# Altium PCB layout.PcbDoc (part 2 of 11)
Units mil, origin at the board's own origin, x right, y up, seen from the top; angles counter-clockwise.
Board outline 3543.31 x 3149.61 mil, 2 copper layers (Top Layer, Bottom Layer); 78 components, 73 nets, 327 pads, 143 vias.
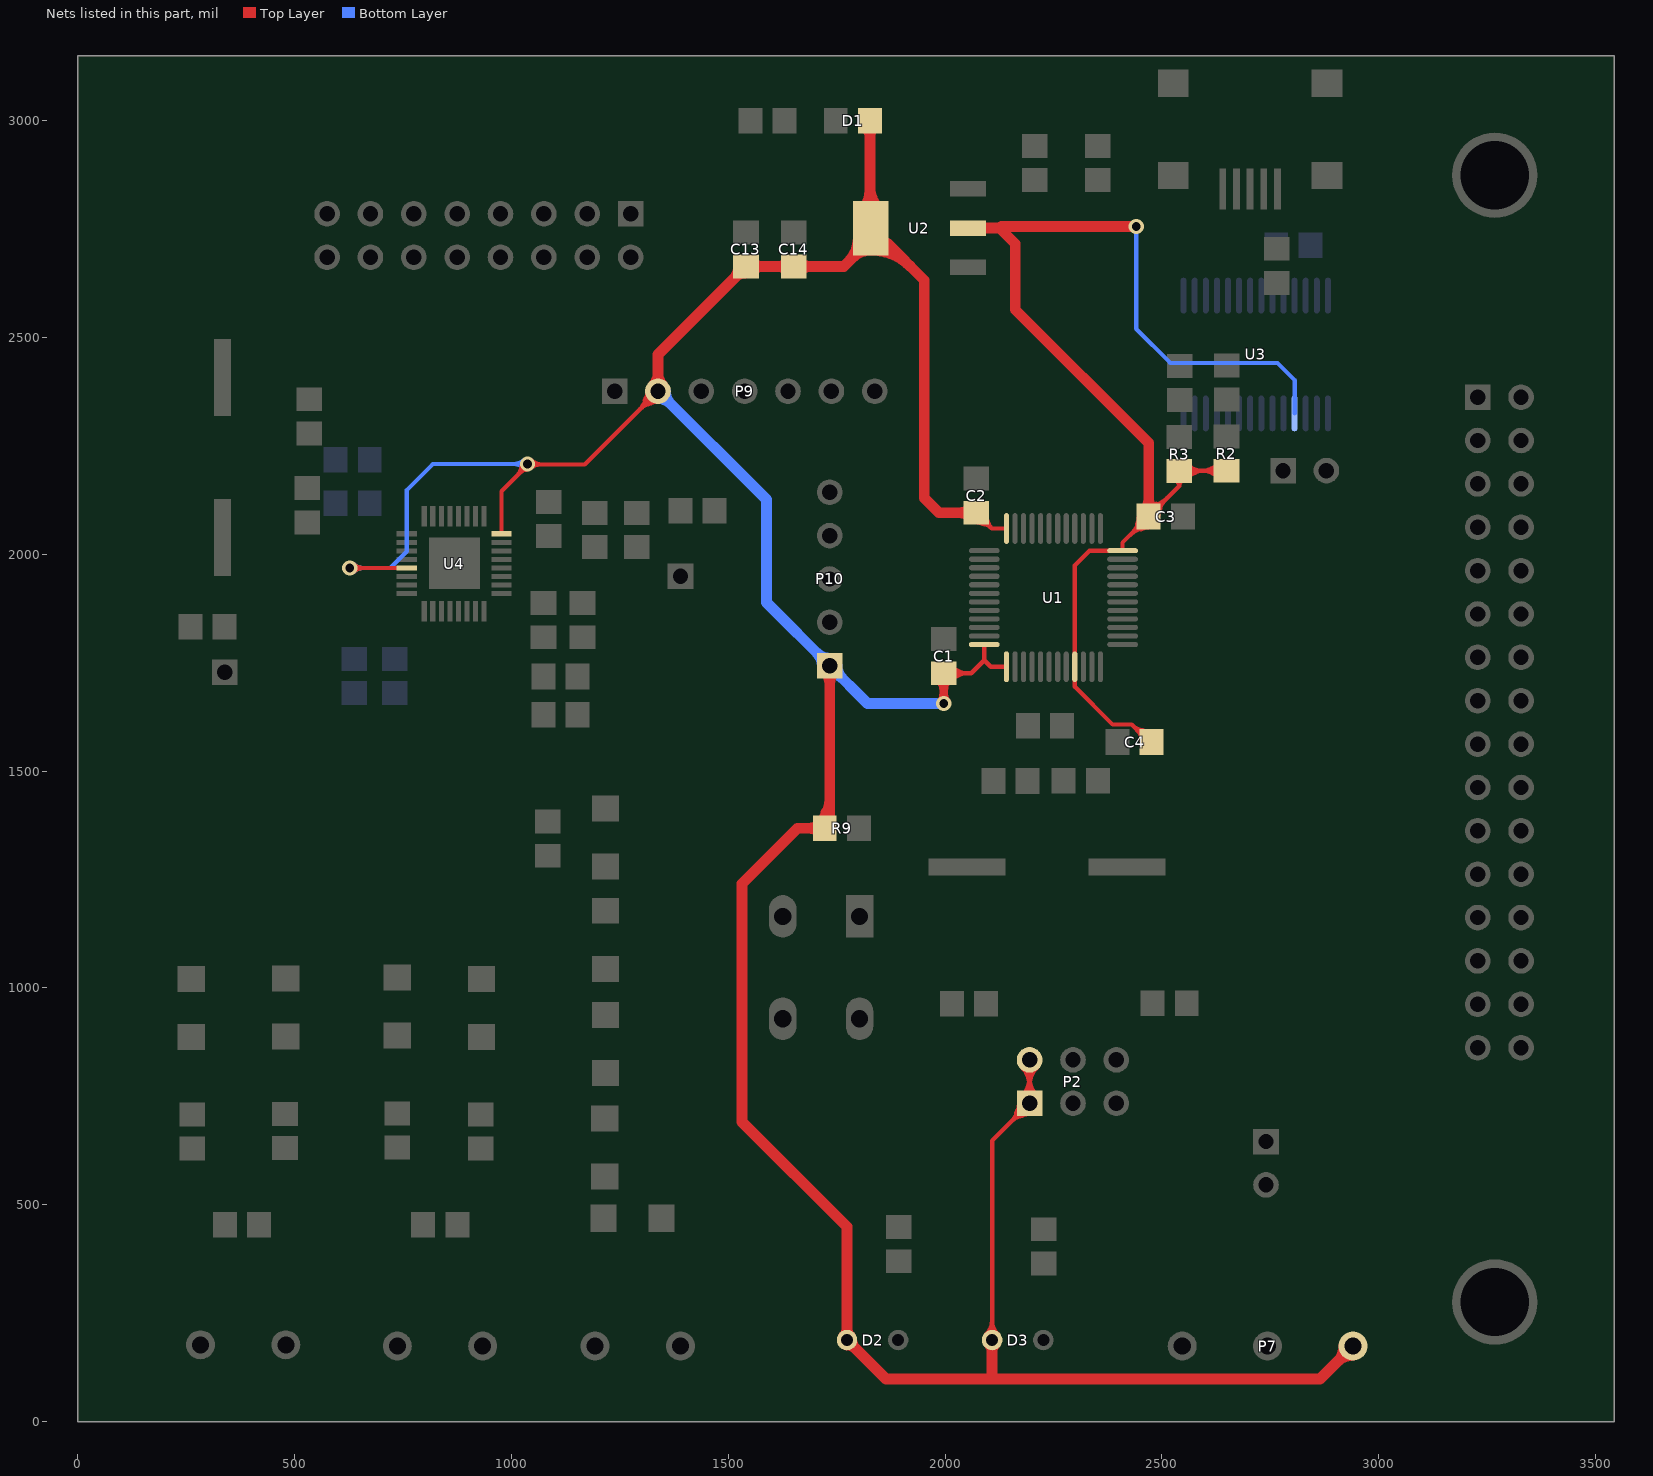
[diagram p2: the nets of this part, all layers, seen from the top]

## Via types
v1: diameter 35, hole 20, Top Layer to Bottom Layer, tented both sides, 113 vias
v2: diameter 35, hole 20, Top Layer to Bottom Layer, 28 vias
v3: diameter 35.43, hole 35.43, Top Layer to Bottom Layer, 2 vias

## Nets (pads, with @x,y where several pads share a name; then routed paths per layer and width w, separated by ;. In a path a pad name is that pad's centre, name@x,y a point inside that pad or via, vN(x,y) a via of type N, cw(c..) or ccw(c..) an arc to the next point about the centre after c; other vN are vias at no path point)
3.3V: C1.2 C2.2 C3.2 C4.2 C13.2 C14.2 D1.1 D2.1 D3.1 P2.1 P2.2 P7.3 P9.2 P10.1 R2.2 R3.2 R9.2 U1.1 U1.9 U1.24 U1.36 U1.48 U2.2 U2.4 U3.4 U4.5 U4.24 | length 34952.4
  Top Layer w10: v2(627.47,1968.47) U4.5@758.72,1968.47 ; U4.24@977.23,2047.21 977.23,2145.23 v2@1038.5,2206.5 ; v2@1039,2207 1169,2207 P9.2@1338,2376 ; v2(1997,1656) C1.2@1997,1725.63 2060.63,1725.63 2090.55,1755.55 ; C2.2@2072,2095.63 2108.18,2059.45 ; U1.48@2090.55,1791.73 2090.55,1755.55 ; D3.1@2108.59,187.98 2108.59,647.59 P2.1@2195,734 P2.2@2195,834 ; U1.1@2141.73,1740.55 2105.55,1740.55 2090.55,1755.55 ; U1.36@2141.73,2059.45 2108.18,2059.45 ; C4.2@2476.37,1567 2470.27,1567 2429.75,1607.53 ; R2.2@2649,2192.63 2541,2192.63 R3.2@2540,2191.63 2540,2157.37 ; v2@636.31,1959.63 cw(c657.65,1938.29) 657.65,1968.47 ; v2@636.31,1959.63 cw(c657.65,1938.29) 657.65,1968.47 ; v2@636.31,1959.63 cw(c657.65,1938.29) 657.65,1968.47 ; v2@636.31,1959.63 cw(c657.65,1938.29) 657.65,1968.47 ; v2@636.31,1959.63 cw(c657.65,1938.29) 657.65,1968.47 ; v2@636.31,1977.31 ccw(c657.65,1998.65) 657.65,1968.47 ; v2@636.31,1977.31 ccw(c657.65,1998.65) 657.65,1968.47 ; v2@636.31,1977.31 ccw(c657.65,1998.65) 657.65,1968.47 ; v2@636.31,1977.31 ccw(c657.65,1998.65) 657.65,1968.47 ; v2@636.31,1977.31 ccw(c657.65,1998.65) 657.65,1968.47 ; 1013.54,2181.54 ccw(c987.08,2208) v2@1024.5,2208 ; 1013.54,2181.54 ccw(c987.08,2208) v2@1024.5,2208 ; 1013.54,2181.54 ccw(c987.08,2208) v2@1024.5,2208 ; 1013.54,2181.54 ccw(c987.08,2208) v2@1024.5,2208 ; 1013.54,2181.54 ccw(c987.08,2208) v2@1024.5,2208 ; 1018.66,2186.2 cw(c1045.35,2179.04) v2@1037.69,2205.6 ; 1018.66,2186.2 cw(c1045.35,2179.04) v2@1037.69,2205.6 ; 1018.66,2186.2 cw(c1045.35,2179.04) v2@1037.69,2205.6 ; 1018.66,2186.2 cw(c1045.35,2179.04) v2@1037.69,2205.6 ; 1018.66,2186.2 cw(c1045.35,2179.04) v2@1037.69,2205.6 ; 1018.66,2186.2 cw(c1045.35,2179.04) v2@1037.69,2205.6 ; 1018.66,2186.2 cw(c1045.35,2179.04) v2@1037.69,2205.6 ; 1018.66,2186.2 cw(c1045.35,2179.04) v2@1037.69,2205.6 ; 1018.66,2186.2 cw(c1045.35,2179.04) v2@1037.69,2205.6 ; 1018.66,2186.2 cw(c1045.35,2179.04) v2@1037.69,2205.6 ; 1020.78,2188.78 cw(c1037,2172.57) v2@1037,2195.5 ; 1020.78,2188.78 cw(c1037,2172.57) v2@1037,2195.5 ; 1020.78,2188.78 cw(c1037,2172.57) v2@1037,2195.5 ; 1020.78,2188.78 cw(c1037,2172.57) v2@1037,2195.5 ; 1020.78,2188.78 cw(c1037,2172.57) v2@1037,2195.5 ; v2@1045.84,2199.16 cw(c1064.76,2180.24) 1064.76,2207 ; v2@1045.84,2199.16 cw(c1064.76,2180.24) 1064.76,2207 ; v2@1045.84,2199.16 cw(c1064.76,2180.24) 1064.76,2207 ; v2@1045.84,2199.16 cw(c1064.76,2180.24) 1064.76,2207 ; v2@1045.84,2199.16 cw(c1064.76,2180.24) 1064.76,2207 ; v2@1045.84,2216.84 ccw(c1069.59,2240.59) 1069.59,2207 ; v2@1045.84,2216.84 ccw(c1069.59,2240.59) 1069.59,2207 ; v2@1045.84,2216.84 ccw(c1069.59,2240.59) 1069.59,2207 ; v2@1045.84,2216.84 ccw(c1069.59,2240.59) 1069.59,2207 ; v2@1045.84,2216.84 ccw(c1069.59,2240.59) 1069.59,2207 ; 1296.13,2334.13 cw(c1338,2292.26) P9.2@1338,2351.47 ; 1296.13,2334.13 ccw(c1254.26,2376) P9.2@1313.47,2376 ; 1296.13,2334.13 cw(c1338,2292.26) P9.2@1338,2351.47 ; 1296.13,2334.13 ccw(c1254.26,2376) P9.2@1313.47,2376 ; 1296.13,2334.13 cw(c1338,2292.26) P9.2@1338,2351.47 ; 1296.13,2334.13 ccw(c1254.26,2376) P9.2@1313.47,2376 ; 1296.13,2334.13 cw(c1338,2292.26) P9.2@1338,2351.47 ; 1296.13,2334.13 ccw(c1254.26,2376) P9.2@1313.47,2376 ; 1296.13,2334.13 cw(c1338,2292.26) P9.2@1338,2351.47 ; 1296.13,2334.13 ccw(c1254.26,2376) P9.2@1313.47,2376 ; 1307.48,2353.65 cw(c1344.61,2343.7) P9.2@1336.9,2381.36 ; 1307.48,2353.65 cw(c1344.61,2343.7) P9.2@1336.9,2381.36 ; 1307.48,2353.65 cw(c1344.61,2343.7) P9.2@1336.9,2381.36 ; 1307.48,2353.65 cw(c1344.61,2343.7) P9.2@1336.9,2381.36 ; 1307.48,2353.65 cw(c1344.61,2343.7) P9.2@1336.9,2381.36 ; 1307.48,2353.65 cw(c1344.61,2343.7) P9.2@1336.9,2381.36 ; 1307.48,2353.65 cw(c1344.61,2343.7) P9.2@1336.9,2381.36 ; 1307.48,2353.65 cw(c1344.61,2343.7) P9.2@1336.9,2381.36 ; 1307.48,2353.65 cw(c1344.61,2343.7) P9.2@1336.9,2381.36 ; 1307.48,2353.65 cw(c1344.61,2343.7) P9.2@1336.9,2381.36 ; 1313.2,2351.2 cw(c1338,2326.4) P9.2@1338,2361.47 ; 1313.2,2351.2 ccw(c1288.4,2376) P9.2@1323.47,2376 ; 1313.2,2351.2 cw(c1338,2326.4) P9.2@1338,2361.47 ; 1313.2,2351.2 ccw(c1288.4,2376) P9.2@1323.47,2376 ; 1313.2,2351.2 cw(c1338,2326.4) P9.2@1338,2361.47 ; 1313.2,2351.2 ccw(c1288.4,2376) P9.2@1323.47,2376 ; 1313.2,2351.2 cw(c1338,2326.4) P9.2@1338,2361.47 ; 1313.2,2351.2 ccw(c1288.4,2376) P9.2@1323.47,2376 ; 1313.2,2351.2 cw(c1338,2326.4) P9.2@1338,2361.47 ; 1313.2,2351.2 ccw(c1288.4,2376) P9.2@1323.47,2376 ; 1315.65,2345.48 ccw(c1305.7,2382.61) P9.2@1343.36,2374.9 ; 1315.65,2345.48 ccw(c1305.7,2382.61) P9.2@1343.36,2374.9 ; 1315.65,2345.48 ccw(c1305.7,2382.61) P9.2@1343.36,2374.9 ; 1315.65,2345.48 ccw(c1305.7,2382.61) P9.2@1343.36,2374.9 ; 1315.65,2345.48 ccw(c1305.7,2382.61) P9.2@1343.36,2374.9 ; 1315.65,2345.48 ccw(c1305.7,2382.61) P9.2@1343.36,2374.9 ; 1315.65,2345.48 ccw(c1305.7,2382.61) P9.2@1343.36,2374.9 ; 1315.65,2345.48 ccw(c1305.7,2382.61) P9.2@1343.36,2374.9 ; 1315.65,2345.48 ccw(c1305.7,2382.61) P9.2@1343.36,2374.9 ; 1315.65,2345.48 ccw(c1305.7,2382.61) P9.2@1343.36,2374.9 ; C1.2@1981.05,1709.68 cw(c1942.54,1671.17) v2@1997,1671.17 ; C1.2@1981.05,1709.68 cw(c1942.54,1671.17) v2@1997,1671.17 ; C1.2@1981.05,1709.68 cw(c1942.54,1671.17) v2@1997,1671.17 ; C1.2@1981.05,1709.68 cw(c1942.54,1671.17) v2@1997,1671.17 ; C1.2@1981.05,1709.68 cw(c1942.54,1671.17) v2@1997,1671.17 ; v2@1986.64,1662.99 ccw(c1957.41,1682.7) 1991.46,1691.83 ; v2@1986.64,1662.99 ccw(c1957.41,1682.7) 1991.46,1691.83 ; v2@1986.64,1662.99 ccw(c1957.41,1682.7) 1991.46,1691.83 ; v2@1986.64,1662.99 ccw(c1957.41,1682.7) 1991.46,1691.83 ; v2@1986.64,1662.99 ccw(c1957.41,1682.7) 1991.46,1691.83 ; v2@1986.64,1662.99 ccw(c1957.41,1682.7) 1991.46,1691.83 ; v2@1986.64,1662.99 ccw(c1957.41,1682.7) 1991.46,1691.83 ; v2@1986.64,1662.99 ccw(c1957.41,1682.7) 1991.46,1691.83 ; v2@1986.64,1662.99 ccw(c1957.41,1682.7) 1991.46,1691.83 ; v2@1986.64,1662.99 ccw(c1957.41,1682.7) 1991.46,1691.83 ; v2@1986.64,1662.99 ccw(c1957.41,1682.7) 1991.46,1691.83 ; v2@1986.64,1662.99 ccw(c1957.41,1682.7) 1991.46,1691.83 ; v2@1986.64,1662.99 ccw(c1957.41,1682.7) 1991.46,1691.83 ; v2@1986.64,1662.99 ccw(c1957.41,1682.7) 1991.46,1691.83 ; v2@1986.64,1662.99 ccw(c1957.41,1682.7) 1991.46,1691.83 ; C1.2@1988.12,1716.75 cw(c1966.68,1695.31) 1997,1695.31 ; C1.2@1988.12,1716.75 cw(c1966.68,1695.31) 1997,1695.31 ; C1.2@1988.12,1716.75 cw(c1966.68,1695.31) 1997,1695.31 ; C1.2@1988.12,1716.75 cw(c1966.68,1695.31) 1997,1695.31 ; C1.2@1988.12,1716.75 cw(c1966.68,1695.31) 1997,1695.31 ; v2@1988.16,1664.84 ccw(c1966.82,1686.18) 1997,1686.18 ; v2@1988.16,1664.84 ccw(c1966.82,1686.18) 1997,1686.18 ; v2@1988.16,1664.84 ccw(c1966.82,1686.18) 1997,1686.18 ; v2@1988.16,1664.84 ccw(c1966.82,1686.18) 1997,1686.18 ; v2@1988.16,1664.84 ccw(c1966.82,1686.18) 1997,1686.18 ; v2@1990.75,1666.83 ccw(c1982.36,1681.35) 1998.57,1677.01 ; v2@1990.75,1666.83 ccw(c1982.36,1681.35) 1998.57,1677.01 ; v2@1990.75,1666.83 ccw(c1982.36,1681.35) 1998.57,1677.01 ; v2@1990.75,1666.83 ccw(c1982.36,1681.35) 1998.57,1677.01 ; v2@1990.75,1666.83 ccw(c1982.36,1681.35) 1998.57,1677.01 ; v2@1990.75,1666.83 ccw(c1982.36,1681.35) 1998.57,1677.01 ; v2@1990.75,1666.83 ccw(c1982.36,1681.35) 1998.57,1677.01 ; v2@1990.75,1666.83 ccw(c1982.36,1681.35) 1998.57,1677.01 ; v2@1990.75,1666.83 ccw(c1982.36,1681.35) 1998.57,1677.01 ; v2@1990.75,1666.83 ccw(c1982.36,1681.35) 1998.57,1677.01 ; v2@1990.75,1666.83 ccw(c1982.36,1681.35) 1998.57,1677.01 ; v2@1990.75,1666.83 ccw(c1982.36,1681.35) 1998.57,1677.01 ; v2@1990.75,1666.83 ccw(c1982.36,1681.35) 1998.57,1677.01 ; v2@1990.75,1666.83 ccw(c1982.36,1681.35) 1998.57,1677.01 ; v2@1990.75,1666.83 ccw(c1982.36,1681.35) 1998.57,1677.01 ; 1995.43,1677.01 ccw(c2011.64,1681.35) v2@2003.25,1666.83 ; 1995.43,1677.01 ccw(c2011.64,1681.35) v2@2003.25,1666.83 ; 1995.43,1677.01 ccw(c2011.64,1681.35) v2@2003.25,1666.83 ; 1995.43,1677.01 ccw(c2011.64,1681.35) v2@2003.25,1666.83 ; 1995.43,1677.01 ccw(c2011.64,1681.35) v2@2003.25,1666.83 ; 1995.43,1677.01 ccw(c2011.64,1681.35) v2@2003.25,1666.83 ; 1995.43,1677.01 ccw(c2011.64,1681.35) v2@2003.25,1666.83 ; 1995.43,1677.01 ccw(c2011.64,1681.35) v2@2003.25,1666.83 ; 1995.43,1677.01 ccw(c2011.64,1681.35) v2@2003.25,1666.83 ; 1995.43,1677.01 ccw(c2011.64,1681.35) v2@2003.25,1666.83 ; 1995.43,1677.01 ccw(c2011.64,1681.35) v2@2003.25,1666.83 ; 1995.43,1677.01 ccw(c2011.64,1681.35) v2@2003.25,1666.83 ; 1995.43,1677.01 ccw(c2011.64,1681.35) v2@2003.25,1666.83 ; 1995.43,1677.01 ccw(c2011.64,1681.35) v2@2003.25,1666.83 ; 1995.43,1677.01 ccw(c2011.64,1681.35) v2@2003.25,1666.83 ; v2@1997,1671.17 cw(c2051.46,1671.17) C1.2@2012.95,1709.68 ; v2@1997,1671.17 cw(c2051.46,1671.17) C1.2@2012.95,1709.68 ; v2@1997,1671.17 cw(c2051.46,1671.17) C1.2@2012.95,1709.68 ; v2@1997,1671.17 cw(c2051.46,1671.17) C1.2@2012.95,1709.68 ; v2@1997,1671.17 cw(c2051.46,1671.17) C1.2@2012.95,1709.68 ; 1997,1686.18 ccw(c2027.18,1686.18) v2@2005.84,1664.84 ; 1997,1686.18 ccw(c2027.18,1686.18) v2@2005.84,1664.84 ; 1997,1686.18 ccw(c2027.18,1686.18) v2@2005.84,1664.84 ; 1997,1686.18 ccw(c2027.18,1686.18) v2@2005.84,1664.84 ; 1997,1686.18 ccw(c2027.18,1686.18) v2@2005.84,1664.84 ; 1997,1695.31 cw(c2027.32,1695.31) C1.2@2005.88,1716.75 ; 1997,1695.31 cw(c2027.32,1695.31) C1.2@2005.88,1716.75 ; 1997,1695.31 cw(c2027.32,1695.31) C1.2@2005.88,1716.75 ; 1997,1695.31 cw(c2027.32,1695.31) C1.2@2005.88,1716.75 ; 1997,1695.31 cw(c2027.32,1695.31) C1.2@2005.88,1716.75 ; 2002.54,1691.83 ccw(c2036.59,1682.7) v2@2007.36,1662.99 ; 2002.54,1691.83 ccw(c2036.59,1682.7) v2@2007.36,1662.99 ; 2002.54,1691.83 ccw(c2036.59,1682.7) v2@2007.36,1662.99 ; 2002.54,1691.83 ccw(c2036.59,1682.7) v2@2007.36,1662.99 ; 2002.54,1691.83 ccw(c2036.59,1682.7) v2@2007.36,1662.99 ; 2002.54,1691.83 ccw(c2036.59,1682.7) v2@2007.36,1662.99 ; 2002.54,1691.83 ccw(c2036.59,1682.7) v2@2007.36,1662.99 ; 2002.54,1691.83 ccw(c2036.59,1682.7) v2@2007.36,1662.99 ; 2002.54,1691.83 ccw(c2036.59,1682.7) v2@2007.36,1662.99 ; 2002.54,1691.83 ccw(c2036.59,1682.7) v2@2007.36,1662.99 ; 2002.54,1691.83 ccw(c2036.59,1682.7) v2@2007.36,1662.99 ; 2002.54,1691.83 ccw(c2036.59,1682.7) v2@2007.36,1662.99 ; 2002.54,1691.83 ccw(c2036.59,1682.7) v2@2007.36,1662.99 ; 2002.54,1691.83 ccw(c2036.59,1682.7) v2@2007.36,1662.99 ; 2002.54,1691.83 ccw(c2036.59,1682.7) v2@2007.36,1662.99 ; C1.2@2007.85,1716.75 cw(c2029.29,1695.31) 2029.29,1725.63 ; C1.2@2007.85,1716.75 cw(c2029.29,1695.31) 2029.29,1725.63 ; C1.2@2007.85,1716.75 cw(c2029.29,1695.31) 2029.29,1725.63 ; C1.2@2007.85,1716.75 cw(c2029.29,1695.31) 2029.29,1725.63 ; C1.2@2007.85,1716.75 cw(c2029.29,1695.31) 2029.29,1725.63 ; C1.2@2007.85,1734.51 ccw(c2029.29,1755.95) 2029.29,1725.63 ; C1.2@2007.85,1734.51 ccw(c2029.29,1755.95) 2029.29,1725.63 ; C1.2@2007.85,1734.51 ccw(c2029.29,1755.95) 2029.29,1725.63 ; C1.2@2007.85,1734.51 ccw(c2029.29,1755.95) 2029.29,1725.63 ; C1.2@2007.85,1734.51 ccw(c2029.29,1755.95) 2029.29,1725.63 ; C1.2@2014.92,1709.68 cw(c2053.43,1671.17) 2053.43,1725.63 ; C1.2@2014.92,1709.68 cw(c2053.43,1671.17) 2053.43,1725.63 ; C1.2@2014.92,1709.68 cw(c2053.43,1671.17) 2053.43,1725.63 ; C1.2@2014.92,1709.68 cw(c2053.43,1671.17) 2053.43,1725.63 ; C1.2@2014.92,1709.68 cw(c2053.43,1671.17) 2053.43,1725.63 ; C1.2@2014.92,1741.58 ccw(c2053.43,1780.09) 2053.43,1725.63 ; C1.2@2014.92,1741.58 ccw(c2053.43,1780.09) 2053.43,1725.63 ; C1.2@2014.92,1741.58 ccw(c2053.43,1780.09) 2053.43,1725.63 ; C1.2@2014.92,1741.58 ccw(c2053.43,1780.09) 2053.43,1725.63 ; C1.2@2014.92,1741.58 ccw(c2053.43,1780.09) 2053.43,1725.63 ; C2.2@2066.7,2094.05 ccw(c2099.04,2101.06) C2.2@2091.08,2068.94 ; C2.2@2066.7,2094.05 ccw(c2099.04,2101.06) C2.2@2091.08,2068.94 ; C2.2@2066.7,2094.05 ccw(c2099.04,2101.06) C2.2@2091.08,2068.94 ; C2.2@2066.7,2094.05 ccw(c2099.04,2101.06) C2.2@2091.08,2068.94 ; C2.2@2066.7,2094.05 ccw(c2099.04,2101.06) C2.2@2091.08,2068.94 ; C2.2@2066.7,2094.05 ccw(c2099.04,2101.06) C2.2@2091.08,2068.94 ; C2.2@2066.7,2094.05 ccw(c2099.04,2101.06) C2.2@2091.08,2068.94 ; C2.2@2066.7,2094.05 ccw(c2099.04,2101.06) C2.2@2091.08,2068.94 ; C2.2@2066.7,2094.05 ccw(c2099.04,2101.06) C2.2@2091.08,2068.94 ; C2.2@2066.7,2094.05 ccw(c2099.04,2101.06) C2.2@2091.08,2068.94 ; C2.2@2074.39,2073.07 cw(c2075.27,2026.54) 2108.18,2059.45 ; C2.2@2074.39,2073.07 cw(c2075.27,2026.54) 2108.18,2059.45 ; C2.2@2074.39,2073.07 cw(c2075.27,2026.54) 2108.18,2059.45 ; C2.2@2074.39,2073.07 cw(c2075.27,2026.54) 2108.18,2059.45 ; C2.2@2074.39,2073.07 cw(c2075.27,2026.54) 2108.18,2059.45 ; C2.2@2086.45,2094.23 ccw(c2110.84,2091.5) C2.2@2093.49,2074.14 ; C2.2@2086.45,2094.23 ccw(c2110.84,2091.5) C2.2@2093.49,2074.14 ; C2.2@2086.45,2094.23 ccw(c2110.84,2091.5) C2.2@2093.49,2074.14 ; C2.2@2086.45,2094.23 ccw(c2110.84,2091.5) C2.2@2093.49,2074.14 ; C2.2@2086.45,2094.23 ccw(c2110.84,2091.5) C2.2@2093.49,2074.14 ; D3.1@2095.42,201.14 ccw(c2063.63,232.93) 2108.59,232.93 ; D3.1@2095.42,201.14 ccw(c2063.63,232.93) 2108.59,232.93 ; D3.1@2095.42,201.14 ccw(c2063.63,232.93) 2108.59,232.93 ; D3.1@2095.42,201.14 ccw(c2063.63,232.93) 2108.59,232.93 ; D3.1@2095.42,201.14 ccw(c2063.63,232.93) 2108.59,232.93 ; C2.2@2096.39,2093.12 ccw(c2137.27,2088.54) 2108.18,2059.45 ; C2.2@2096.39,2093.12 ccw(c2137.27,2088.54) 2108.18,2059.45 ; C2.2@2096.39,2093.12 ccw(c2137.27,2088.54) 2108.18,2059.45 ; C2.2@2096.39,2093.12 ccw(c2137.27,2088.54) 2108.18,2059.45 ; C2.2@2096.39,2093.12 ccw(c2137.27,2088.54) 2108.18,2059.45 ; 2108.59,232.93 ccw(c2153.55,232.93) D3.1@2121.76,201.14 ; 2108.59,232.93 ccw(c2153.55,232.93) D3.1@2121.76,201.14 ; 2108.59,232.93 ccw(c2153.55,232.93) D3.1@2121.76,201.14 ; 2108.59,232.93 ccw(c2153.55,232.93) D3.1@2121.76,201.14 ; 2108.59,232.93 ccw(c2153.55,232.93) D3.1@2121.76,201.14 ; 2153.13,692.13 cw(c2195,650.26) P2.1@2195,709.47 ; 2153.13,692.13 ccw(c2111.26,734) P2.1@2170.47,734 ; 2153.13,692.13 cw(c2195,650.26) P2.1@2195,709.47 ; 2153.13,692.13 ccw(c2111.26,734) P2.1@2170.47,734 ; 2153.13,692.13 cw(c2195,650.26) P2.1@2195,709.47 ; 2153.13,692.13 ccw(c2111.26,734) P2.1@2170.47,734 ; 2153.13,692.13 cw(c2195,650.26) P2.1@2195,709.47 ; 2153.13,692.13 ccw(c2111.26,734) P2.1@2170.47,734 ; 2153.13,692.13 cw(c2195,650.26) P2.1@2195,709.47 ; 2153.13,692.13 ccw(c2111.26,734) P2.1@2170.47,734 ; 2164.48,711.65 cw(c2201.61,701.7) P2.1@2193.9,739.36 ; 2164.48,711.65 cw(c2201.61,701.7) P2.1@2193.9,739.36 ; 2164.48,711.65 cw(c2201.61,701.7) P2.1@2193.9,739.36 ; 2164.48,711.65 cw(c2201.61,701.7) P2.1@2193.9,739.36 ; 2164.48,711.65 cw(c2201.61,701.7) P2.1@2193.9,739.36 ; 2164.48,711.65 cw(c2201.61,701.7) P2.1@2193.9,739.36 ; 2164.48,711.65 cw(c2201.61,701.7) P2.1@2193.9,739.36 ; 2164.48,711.65 cw(c2201.61,701.7) P2.1@2193.9,739.36 ; 2164.48,711.65 cw(c2201.61,701.7) P2.1@2193.9,739.36 ; 2164.48,711.65 cw(c2201.61,701.7) P2.1@2193.9,739.36 ; P2.1@2170.2,709.2 cw(c2195,684.4) P2.1@2195,719.47 ; P2.1@2170.2,709.2 ccw(c2145.4,734) P2.1@2180.47,734 ; P2.1@2170.2,709.2 cw(c2195,684.4) P2.1@2195,719.47 ; P2.1@2170.2,709.2 ccw(c2145.4,734) P2.1@2180.47,734 ; P2.1@2170.2,709.2 cw(c2195,684.4) P2.1@2195,719.47 ; P2.1@2170.2,709.2 ccw(c2145.4,734) P2.1@2180.47,734 ; P2.1@2170.2,709.2 cw(c2195,684.4) P2.1@2195,719.47 ; P2.1@2170.2,709.2 ccw(c2145.4,734) P2.1@2180.47,734 ; P2.1@2170.2,709.2 cw(c2195,684.4) P2.1@2195,719.47 ; P2.1@2170.2,709.2 ccw(c2145.4,734) P2.1@2180.47,734 ; 2172.65,703.48 ccw(c2162.7,740.61) P2.1@2200.36,732.9 ; 2172.65,703.48 ccw(c2162.7,740.61) P2.1@2200.36,732.9 ; 2172.65,703.48 ccw(c2162.7,740.61) P2.1@2200.36,732.9 ; 2172.65,703.48 ccw(c2162.7,740.61) P2.1@2200.36,732.9 ; 2172.65,703.48 ccw(c2162.7,740.61) P2.1@2200.36,732.9 ; 2172.65,703.48 ccw(c2162.7,740.61) P2.1@2200.36,732.9 ; 2172.65,703.48 ccw(c2162.7,740.61) P2.1@2200.36,732.9 ; 2172.65,703.48 ccw(c2162.7,740.61) P2.1@2200.36,732.9 ; 2172.65,703.48 ccw(c2162.7,740.61) P2.1@2200.36,732.9 ; 2172.65,703.48 ccw(c2162.7,740.61) P2.1@2200.36,732.9 ; P2.1@2177.66,751.34 ccw(c2135.79,793.21) 2195,793.21 ; P2.1@2177.66,751.34 ccw(c2135.79,793.21) 2195,793.21 ; P2.1@2177.66,751.34 ccw(c2135.79,793.21) 2195,793.21 ; P2.1@2177.66,751.34 ccw(c2135.79,793.21) 2195,793.21 ; P2.1@2177.66,751.34 ccw(c2135.79,793.21) 2195,793.21 ; P2.2@2177.66,816.66 cw(c2135.79,774.79) 2195,774.79 ; P2.2@2177.66,816.66 cw(c2135.79,774.79) 2195,774.79 ; P2.2@2177.66,816.66 cw(c2135.79,774.79) 2195,774.79 ; P2.2@2177.66,816.66 cw(c2135.79,774.79) 2195,774.79 ; P2.2@2177.66,816.66 cw(c2135.79,774.79) 2195,774.79 ; P2.1@2184.73,744.27 ccw(c2159.93,769.07) 2195,769.07 ; P2.1@2184.73,744.27 ccw(c2159.93,769.07) 2195,769.07 ; P2.1@2184.73,744.27 ccw(c2159.93,769.07) 2195,769.07 ; P2.1@2184.73,744.27 ccw(c2159.93,769.07) 2195,769.07 ; P2.1@2184.73,744.27 ccw(c2159.93,769.07) 2195,769.07 ; P2.2@2184.73,823.73 cw(c2159.93,798.93) 2195,798.93 ; P2.2@2184.73,823.73 cw(c2159.93,798.93) 2195,798.93 ; P2.2@2184.73,823.73 cw(c2159.93,798.93) 2195,798.93 ; P2.2@2184.73,823.73 cw(c2159.93,798.93) 2195,798.93 ; P2.2@2184.73,823.73 cw(c2159.93,798.93) 2195,798.93 ; 2195,769.07 ccw(c2230.07,769.07) P2.1@2205.27,744.27 ; 2195,769.07 ccw(c2230.07,769.07) P2.1@2205.27,744.27 ; 2195,769.07 ccw(c2230.07,769.07) P2.1@2205.27,744.27 ; 2195,769.07 ccw(c2230.07,769.07) P2.1@2205.27,744.27 ; 2195,769.07 ccw(c2230.07,769.07) P2.1@2205.27,744.27 ; 2195,774.79 cw(c2254.22,774.79) P2.2@2212.34,816.66 ; 2195,774.79 cw(c2254.22,774.79) P2.2@2212.34,816.66 ; 2195,774.79 cw(c2254.22,774.79) P2.2@2212.34,816.66 ; 2195,774.79 cw(c2254.22,774.79) P2.2@2212.34,816.66 ; 2195,774.79 cw(c2254.22,774.79) P2.2@2212.34,816.66 ; 2195,793.21 ccw(c2254.22,793.21) P2.1@2212.34,751.34 ; 2195,793.21 ccw(c2254.22,793.21) P2.1@2212.34,751.34 ; 2195,793.21 ccw(c2254.22,793.21) P2.1@2212.34,751.34 ; 2195,793.21 ccw(c2254.22,793.21) P2.1@2212.34,751.34 ; 2195,793.21 ccw(c2254.22,793.21) P2.1@2212.34,751.34 ; 2195,798.93 cw(c2230.07,798.93) P2.2@2205.27,823.73 ; 2195,798.93 cw(c2230.07,798.93) P2.2@2205.27,823.73 ; 2195,798.93 cw(c2230.07,798.93) P2.2@2205.27,823.73 ; 2195,798.93 cw(c2230.07,798.93) P2.2@2205.27,823.73 ; 2195,798.93 cw(c2230.07,798.93) P2.2@2205.27,823.73 ; 2427.76,2045.13 cw(c2469.63,2003.26) C3.2@2469.63,2062.47 ; 2427.76,2045.13 cw(c2469.63,2003.26) C3.2@2469.63,2062.47 ; 2427.76,2045.13 cw(c2469.63,2003.26) C3.2@2469.63,2062.47 ; 2427.76,2045.13 cw(c2469.63,2003.26) C3.2@2469.63,2062.47 ; 2427.76,2045.13 cw(c2469.63,2003.26) C3.2@2469.63,2062.47 ; 2429.75,1607.53 ccw(c2469.17,1646.95) C4.2@2474.3,1591.43 ; 2429.75,1607.53 ccw(c2469.17,1646.95) C4.2@2474.3,1591.43 ; 2429.75,1607.53 ccw(c2469.17,1646.95) C4.2@2474.3,1591.43 ; 2429.75,1607.53 ccw(c2469.17,1646.95) C4.2@2474.3,1591.43 ; 2429.75,1607.53 ccw(c2469.17,1646.95) C4.2@2474.3,1591.43 ; 2429.75,1607.53 2386.47,1607.53 2299.21,1694.79 U1.9@2299.21,1740.55 2299.21,1974.21 2333.27,2008.27 U1.24@2409.45,2008.27 2409.45,2026.82 C3.2@2469.63,2087 2540,2157.37 ; 2432.51,2049.88 ccw(c2397.36,2085.03) C3.2@2447.07,2085.03 ; 2432.51,2049.88 ccw(c2397.36,2085.03) C3.2@2447.07,2085.03 ; 2432.51,2049.88 ccw(c2397.36,2085.03) C3.2@2447.07,2085.03 ; 2432.51,2049.88 ccw(c2397.36,2085.03) C3.2@2447.07,2085.03 ; 2432.51,2049.88 ccw(c2397.36,2085.03) C3.2@2447.07,2085.03 ; 2435.9,2053.44 ccw(c2424.59,2095.67) C3.2@2467.14,2085.62 ; 2435.9,2053.44 ccw(c2424.59,2095.67) C3.2@2467.14,2085.62 ; 2435.9,2053.44 ccw(c2424.59,2095.67) C3.2@2467.14,2085.62 ; 2435.9,2053.44 ccw(c2424.59,2095.67) C3.2@2467.14,2085.62 ; 2435.9,2053.44 ccw(c2424.59,2095.67) C3.2@2467.14,2085.62 ; 2435.9,2053.44 ccw(c2424.59,2095.67) C3.2@2467.14,2085.62 ; 2435.9,2053.44 ccw(c2424.59,2095.67) C3.2@2467.14,2085.62 ; 2435.9,2053.44 ccw(c2424.59,2095.67) C3.2@2467.14,2085.62 ; 2435.9,2053.44 ccw(c2424.59,2095.67) C3.2@2467.14,2085.62 ; 2435.9,2053.44 ccw(c2424.59,2095.67) C3.2@2467.14,2085.62 ; C3.2@2442.78,2069.01 cw(c2473.82,2060.69) C3.2@2468.37,2092.36 ; C3.2@2442.78,2069.01 cw(c2473.82,2060.69) C3.2@2468.37,2092.36 ; C3.2@2442.78,2069.01 cw(c2473.82,2060.69) C3.2@2468.37,2092.36 ; C3.2@2442.78,2069.01 cw(c2473.82,2060.69) C3.2@2468.37,2092.36 ; C3.2@2442.78,2069.01 cw(c2473.82,2060.69) C3.2@2468.37,2092.36 ; C3.2@2442.78,2069.01 cw(c2473.82,2060.69) C3.2@2468.37,2092.36 ; C3.2@2442.78,2069.01 cw(c2473.82,2060.69) C3.2@2468.37,2092.36 ; C3.2@2442.78,2069.01 cw(c2473.82,2060.69) C3.2@2468.37,2092.36 ; C3.2@2442.78,2069.01 cw(c2473.82,2060.69) C3.2@2468.37,2092.36 ; C3.2@2442.78,2069.01 cw(c2473.82,2060.69) C3.2@2468.37,2092.36 ; 2443.56,1593.71 cw(c2418.82,1568.97) C4.2@2453.81,1568.97 ; 2443.56,1593.71 cw(c2418.82,1568.97) C4.2@2453.81,1568.97 ; 2443.56,1593.71 cw(c2418.82,1568.97) C4.2@2453.81,1568.97 ; 2443.56,1593.71 cw(c2418.82,1568.97) C4.2@2453.81,1568.97 ; 2443.56,1593.71 cw(c2418.82,1568.97) C4.2@2453.81,1568.97 ; 2444.82,1592.46 ccw(c2471.72,1619.36) C4.2@2475.22,1581.47 ; 2444.82,1592.46 ccw(c2471.72,1619.36) C4.2@2475.22,1581.47 ; 2444.82,1592.46 ccw(c2471.72,1619.36) C4.2@2475.22,1581.47 ; 2444.82,1592.46 ccw(c2471.72,1619.36) C4.2@2475.22,1581.47 ; 2444.82,1592.46 ccw(c2471.72,1619.36) C4.2@2475.22,1581.47 ; C3.2@2444.83,2062.2 cw(c2469.63,2037.4) C3.2@2469.63,2072.47 ; C3.2@2444.83,2062.2 cw(c2469.63,2037.4) C3.2@2469.63,2072.47 ; C3.2@2444.83,2062.2 cw(c2469.63,2037.4) C3.2@2469.63,2072.47 ; C3.2@2444.83,2062.2 cw(c2469.63,2037.4) C3.2@2469.63,2072.47 ; C3.2@2444.83,2062.2 cw(c2469.63,2037.4) C3.2@2469.63,2072.47 ; C4.2@2449.31,1595.71 cw(c2441.11,1547.9) C4.2@2482.76,1572.79 ; C4.2@2449.31,1595.71 cw(c2441.11,1547.9) C4.2@2482.76,1572.79 ; C4.2@2449.31,1595.71 cw(c2441.11,1547.9) C4.2@2482.76,1572.79 ; C4.2@2449.31,1595.71 cw(c2441.11,1547.9) C4.2@2482.76,1572.79 ; C4.2@2449.31,1595.71 cw(c2441.11,1547.9) C4.2@2482.76,1572.79 ; C4.2@2449.31,1595.71 cw(c2441.11,1547.9) C4.2@2482.76,1572.79 ; C4.2@2449.31,1595.71 cw(c2441.11,1547.9) C4.2@2482.76,1572.79 ; C4.2@2449.31,1595.71 cw(c2441.11,1547.9) C4.2@2482.76,1572.79 ; C4.2@2449.31,1595.71 cw(c2441.11,1547.9) C4.2@2482.76,1572.79 ; C4.2@2449.31,1595.71 cw(c2441.11,1547.9) C4.2@2482.76,1572.79 ; C3.2@2452.07,2057.77 ccw(c2443.09,2091.3) C3.2@2476.87,2083.32 ; C3.2@2452.07,2057.77 ccw(c2443.09,2091.3) C3.2@2476.87,2083.32 ; C3.2@2452.07,2057.77 ccw(c2443.09,2091.3) C3.2@2476.87,2083.32 ; C3.2@2452.07,2057.77 ccw(c2443.09,2091.3) C3.2@2476.87,2083.32 ; C3.2@2452.07,2057.77 ccw(c2443.09,2091.3) C3.2@2476.87,2083.32 ; C3.2@2452.07,2057.77 ccw(c2443.09,2091.3) C3.2@2476.87,2083.32 ; C3.2@2452.07,2057.77 ccw(c2443.09,2091.3) C3.2@2476.87,2083.32 ; C3.2@2452.07,2057.77 ccw(c2443.09,2091.3) C3.2@2476.87,2083.32 ; C3.2@2452.07,2057.77 ccw(c2443.09,2091.3) C3.2@2476.87,2083.32 ; C3.2@2452.07,2057.77 ccw(c2443.09,2091.3) C3.2@2476.87,2083.32 ; C3.2@2462.39,2090.68 cw(c2496.17,2082.7) C3.2@2487.19,2116.23 ; C3.2@2462.39,2090.68 cw(c2496.17,2082.7) C3.2@2487.19,2116.23 ; C3.2@2462.39,2090.68 cw(c2496.17,2082.7) C3.2@2487.19,2116.23 ; C3.2@2462.39,2090.68 cw(c2496.17,2082.7) C3.2@2487.19,2116.23 ; C3.2@2462.39,2090.68 cw(c2496.17,2082.7) C3.2@2487.19,2116.23 ; C3.2@2462.39,2090.68 cw(c2496.17,2082.7) C3.2@2487.19,2116.23 ; C3.2@2462.39,2090.68 cw(c2496.17,2082.7) C3.2@2487.19,2116.23 ; C3.2@2462.39,2090.68 cw(c2496.17,2082.7) C3.2@2487.19,2116.23 ; C3.2@2462.39,2090.68 cw(c2496.17,2082.7) C3.2@2487.19,2116.23 ; C3.2@2462.39,2090.68 cw(c2496.17,2082.7) C3.2@2487.19,2116.23 ; C3.2@2469.63,2101.53 ccw(c2469.63,2136.6) C3.2@2494.43,2111.8 ; C3.2@2469.63,2101.53 ccw(c2469.63,2136.6) C3.2@2494.43,2111.8 ; C3.2@2469.63,2101.53 ccw(c2469.63,2136.6) C3.2@2494.43,2111.8 ; C3.2@2469.63,2101.53 ccw(c2469.63,2136.6) C3.2@2494.43,2111.8 ; C3.2@2469.63,2101.53 ccw(c2469.63,2136.6) C3.2@2494.43,2111.8 ; C3.2@2469.63,2111.53 ccw(c2469.63,2170.74) 2511.5,2128.87 ; C3.2@2469.63,2111.53 ccw(c2469.63,2170.74) 2511.5,2128.87 ; C3.2@2469.63,2111.53 ccw(c2469.63,2170.74) 2511.5,2128.87 ; C3.2@2469.63,2111.53 ccw(c2469.63,2170.74) 2511.5,2128.87 ; C3.2@2469.63,2111.53 ccw(c2469.63,2170.74) 2511.5,2128.87 ; C3.2@2470.89,2081.64 ccw(c2465.44,2113.31) C3.2@2496.48,2104.99 ; C3.2@2470.89,2081.64 ccw(c2465.44,2113.31) C3.2@2496.48,2104.99 ; C3.2@2470.89,2081.64 ccw(c2465.44,2113.31) C3.2@2496.48,2104.99 ; C3.2@2470.89,2081.64 ccw(c2465.44,2113.31) C3.2@2496.48,2104.99 ; C3.2@2470.89,2081.64 ccw(c2465.44,2113.31) C3.2@2496.48,2104.99 ; C3.2@2470.89,2081.64 ccw(c2465.44,2113.31) C3.2@2496.48,2104.99 ; C3.2@2470.89,2081.64 ccw(c2465.44,2113.31) C3.2@2496.48,2104.99 ; C3.2@2470.89,2081.64 ccw(c2465.44,2113.31) C3.2@2496.48,2104.99 ; C3.2@2470.89,2081.64 ccw(c2465.44,2113.31) C3.2@2496.48,2104.99 ; C3.2@2470.89,2081.64 ccw(c2465.44,2113.31) C3.2@2496.48,2104.99 ; C3.2@2472.12,2088.38 cw(c2514.67,2078.33) 2503.36,2120.56 ; C3.2@2472.12,2088.38 cw(c2514.67,2078.33) 2503.36,2120.56 ; C3.2@2472.12,2088.38 cw(c2514.67,2078.33) 2503.36,2120.56 ; C3.2@2472.12,2088.38 cw(c2514.67,2078.33) 2503.36,2120.56 ; C3.2@2472.12,2088.38 cw(c2514.67,2078.33) 2503.36,2120.56 ; C3.2@2472.12,2088.38 cw(c2514.67,2078.33) 2503.36,2120.56 ; C3.2@2472.12,2088.38 cw(c2514.67,2078.33) 2503.36,2120.56 ; C3.2@2472.12,2088.38 cw(c2514.67,2078.33) 2503.36,2120.56 ; C3.2@2472.12,2088.38 cw(c2514.67,2078.33) 2503.36,2120.56 ; C3.2@2472.12,2088.38 cw(c2514.67,2078.33) 2503.36,2120.56 ; C3.2@2492.19,2088.97 cw(c2541.9,2088.97) 2506.75,2124.12 ; C3.2@2492.19,2088.97 cw(c2541.9,2088.97) 2506.75,2124.12 ; C3.2@2492.19,2088.97 cw(c2541.9,2088.97) 2506.75,2124.12 ; C3.2@2492.19,2088.97 cw(c2541.9,2088.97) 2506.75,2124.12 ; C3.2@2492.19,2088.97 cw(c2541.9,2088.97) 2506.75,2124.12 ; R3.2@2531.09,2170.91 cw(c2525.27,2157.37) 2540,2157.37 ; R3.2@2531.09,2170.91 cw(c2525.27,2157.37) 2540,2157.37 ; R3.2@2531.09,2170.91 cw(c2525.27,2157.37) 2540,2157.37 ; R3.2@2531.09,2170.91 cw(c2525.27,2157.37) 2540,2157.37 ; R3.2@2531.09,2170.91 cw(c2525.27,2157.37) 2540,2157.37 ; 2540,2157.37 cw(c2554.73,2157.37) R3.2@2548.91,2170.91 ; 2540,2157.37 cw(c2554.73,2157.37) R3.2@2548.91,2170.91 ; 2540,2157.37 cw(c2554.73,2157.37) R3.2@2548.91,2170.91 ; 2540,2157.37 cw(c2554.73,2157.37) R3.2@2548.91,2170.91 ; 2540,2157.37 cw(c2554.73,2157.37) R3.2@2548.91,2170.91 ; R3.2@2550.85,2182.75 cw(c2574.7,2158.9) 2574.7,2192.63 ; R3.2@2550.85,2182.75 cw(c2574.7,2158.9) 2574.7,2192.63 ; R3.2@2550.85,2182.75 cw(c2574.7,2158.9) 2574.7,2192.63 ; R3.2@2550.85,2182.75 cw(c2574.7,2158.9) 2574.7,2192.63 ; R3.2@2550.85,2182.75 cw(c2574.7,2158.9) 2574.7,2192.63 ; R3.2@2550.85,2200.51 ccw(c2569.88,2219.54) 2569.88,2192.63 ; R3.2@2550.85,2200.51 ccw(c2569.88,2219.54) 2569.88,2192.63 ; R3.2@2550.85,2200.51 ccw(c2569.88,2219.54) 2569.88,2192.63 ; R3.2@2550.85,2200.51 ccw(c2569.88,2219.54) 2569.88,2192.63 ; R3.2@2550.85,2200.51 ccw(c2569.88,2219.54) 2569.88,2192.63 ; R3.2@2557.92,2175.68 cw(c2598.84,2134.76) 2598.84,2192.63 ; R3.2@2557.92,2175.68 cw(c2598.84,2134.76) 2598.84,2192.63 ; R3.2@2557.92,2175.68 cw(c2598.84,2134.76) 2598.84,2192.63 ; R3.2@2557.92,2175.68 cw(c2598.84,2134.76) 2598.84,2192.63 ; R3.2@2557.92,2175.68 cw(c2598.84,2134.76) 2598.84,2192.63 ; R3.2@2557.92,2207.58 ccw(c2594.02,2243.68) 2594.02,2192.63 ; R3.2@2557.92,2207.58 ccw(c2594.02,2243.68) 2594.02,2192.63 ; R3.2@2557.92,2207.58 ccw(c2594.02,2243.68) 2594.02,2192.63 ; R3.2@2557.92,2207.58 ccw(c2594.02,2243.68) 2594.02,2192.63 ; R3.2@2557.92,2207.58 ccw(c2594.02,2243.68) 2594.02,2192.63 ; 2592.57,2192.63 cw(c2592.57,2138.17) R2.2@2631.08,2176.68 ; 2592.57,2192.63 ccw(c2592.57,2247.09) R2.2@2631.08,2208.58 ; 2592.57,2192.63 cw(c2592.57,2138.17) R2.2@2631.08,2176.68 ; 2592.57,2192.63 ccw(c2592.57,2247.09) R2.2@2631.08,2208.58 ; 2592.57,2192.63 cw(c2592.57,2138.17) R2.2@2631.08,2176.68 ; 2592.57,2192.63 ccw(c2592.57,2247.09) R2.2@2631.08,2208.58 ; 2592.57,2192.63 cw(c2592.57,2138.17) R2.2@2631.08,2176.68 ; 2592.57,2192.63 ccw(c2592.57,2247.09) R2.2@2631.08,2208.58 ; 2592.57,2192.63 cw(c2592.57,2138.17) R2.2@2631.08,2176.68 ; 2592.57,2192.63 ccw(c2592.57,2247.09) R2.2@2631.08,2208.58 ; 2616.71,2192.63 cw(c2616.71,2162.31) R2.2@2638.15,2183.75 ; 2616.71,2192.63 ccw(c2616.71,2222.95) R2.2@2638.15,2201.51 ; 2616.71,2192.63 cw(c2616.71,2162.31) R2.2@2638.15,2183.75 ; 2616.71,2192.63 ccw(c2616.71,2222.95) R2.2@2638.15,2201.51 ; 2616.71,2192.63 cw(c2616.71,2162.31) R2.2@2638.15,2183.75 ; 2616.71,2192.63 ccw(c2616.71,2222.95) R2.2@2638.15,2201.51 ; 2616.71,2192.63 cw(c2616.71,2162.31) R2.2@2638.15,2183.75 ; 2616.71,2192.63 ccw(c2616.71,2222.95) R2.2@2638.15,2201.51 ; 2616.71,2192.63 cw(c2616.71,2162.31) R2.2@2638.15,2183.75 ; 2616.71,2192.63 ccw(c2616.71,2222.95) R2.2@2638.15,2201.51
  Top Layer w25: P9.2@1338,2376 1338,2460.48 C13.2@1541.04,2663.52 C14.2@1651.28,2663.52 1766.52,2663.52 1788,2685 ; P10.1@1734,1743 1734,1379.37 R9.2@1722.63,1368 1660,1368 1532,1240 1532,691 1773.95,449.05 D2.1@1773.95,187.98 1863.92,98 2109,98 ; D1.1@1826.77,3000 1826.77,2753.94 U2.4@1828.74,2751.97 ; U2.4@1850.39,2716.54 1867.46,2716.54 1952,2632 1952,2130 1986.37,2095.63 C2.2@2072,2095.63 ; U2.2@2053.15,2751.97 2126.03,2751.97 2162,2716 2162,2564 2469.63,2256.37 C3.2@2469.63,2087 ; D3.1@2108.59,187.98 2108.59,98.41 2109,98 ; 2129.97,2755.91 v2(2440.94,2755.91) ; P7.3@2940.7,174 2864.7,98 2109,98 ; P9.2@1325.96,2388.04 ccw(c1296.89,2417.11) 1338,2417.11 ; P9.2@1325.96,2388.04 ccw(c1296.89,2417.11) 1338,2417.11 ; P9.2@1325.96,2388.04 ccw(c1296.89,2417.11) 1338,2417.11 ; P9.2@1325.96,2388.04 ccw(c1296.89,2417.11) 1338,2417.11 ; P9.2@1325.96,2388.04 ccw(c1296.89,2417.11) 1338,2417.11 ; 1338,2417.11 ccw(c1379.11,2417.11) P9.2@1350.04,2388.04 ; 1338,2417.11 ccw(c1379.11,2417.11) P9.2@1350.04,2388.04 ; 1338,2417.11 ccw(c1379.11,2417.11) P9.2@1350.04,2388.04 ; 1338,2417.11 ccw(c1379.11,2417.11) P9.2@1350.04,2388.04 ; 1338,2417.11 ccw(c1379.11,2417.11) P9.2@1350.04,2388.04 ; 1511.97,2634.45 ccw(c1482.9,2663.52) C13.2@1524.01,2663.52 ; 1511.97,2634.45 ccw(c1482.9,2663.52) C13.2@1524.01,2663.52 ; 1511.97,2634.45 ccw(c1482.9,2663.52) C13.2@1524.01,2663.52 ; 1511.97,2634.45 ccw(c1482.9,2663.52) C13.2@1524.01,2663.52 ; 1511.97,2634.45 ccw(c1482.9,2663.52) C13.2@1524.01,2663.52 ; C13.2@1516.72,2639.2 cw(c1539.07,2616.86) C13.2@1539.07,2648.46 ; C13.2@1516.72,2639.2 cw(c1539.07,2616.86) C13.2@1539.07,2648.46 ; C13.2@1516.72,2639.2 cw(c1539.07,2616.86) C13.2@1539.07,2648.46 ; C13.2@1516.72,2639.2 cw(c1539.07,2616.86) C13.2@1539.07,2648.46 ; C13.2@1516.72,2639.2 cw(c1539.07,2616.86) C13.2@1539.07,2648.46 ; C13.2@1553.66,2652.87 cw(c1579.36,2627.16) 1579.36,2663.52 ; C13.2@1553.66,2652.87 cw(c1579.36,2627.16) 1579.36,2663.52 ; C13.2@1553.66,2652.87 cw(c1579.36,2627.16) 1579.36,2663.52 ; C13.2@1553.66,2652.87 cw(c1579.36,2627.16) 1579.36,2663.52 ; C13.2@1553.66,2652.87 cw(c1579.36,2627.16) 1579.36,2663.52 ; C13.2@1553.66,2674.17 ccw(c1579.36,2699.88) 1579.36,2663.52 ; C13.2@1553.66,2674.17 ccw(c1579.36,2699.88) 1579.36,2663.52 ; C13.2@1553.66,2674.17 ccw(c1579.36,2699.88) 1579.36,2663.52 ; C13.2@1553.66,2674.17 ccw(c1579.36,2699.88) 1579.36,2663.52 ; C13.2@1553.66,2674.17 ccw(c1579.36,2699.88) 1579.36,2663.52 ; 1612.95,2663.52 cw(c1612.95,2627.16) C14.2@1638.66,2652.87 ; 1612.95,2663.52 ccw(c1612.95,2699.88) C14.2@1638.66,2674.17 ; 1612.95,2663.52 cw(c1612.95,2627.16) C14.2@1638.66,2652.87 ; 1612.95,2663.52 ccw(c1612.95,2699.88) C14.2@1638.66,2674.17 ; 1612.95,2663.52 cw(c1612.95,2627.16) C14.2@1638.66,2652.87 ; 1612.95,2663.52 ccw(c1612.95,2699.88) C14.2@1638.66,2674.17 ; 1612.95,2663.52 cw(c1612.95,2627.16) C14.2@1638.66,2652.87 ; 1612.95,2663.52 ccw(c1612.95,2699.88) C14.2@1638.66,2674.17 ; 1612.95,2663.52 cw(c1612.95,2627.16) C14.2@1638.66,2652.87 ; 1612.95,2663.52 ccw(c1612.95,2699.88) C14.2@1638.66,2674.17 ; C14.2@1663.89,2652.87 cw(c1689.6,2627.16) 1689.6,2663.52 ; C14.2@1663.89,2652.87 cw(c1689.6,2627.16) 1689.6,2663.52 ; C14.2@1663.89,2652.87 cw(c1689.6,2627.16) 1689.6,2663.52 ; C14.2@1663.89,2652.87 cw(c1689.6,2627.16) 1689.6,2663.52 ; C14.2@1663.89,2652.87 cw(c1689.6,2627.16) 1689.6,2663.52 ; C14.2@1663.89,2674.17 ccw(c1689.6,2699.88) 1689.6,2663.52 ; C14.2@1663.89,2674.17 ccw(c1689.6,2699.88) 1689.6,2663.52 ; C14.2@1663.89,2674.17 ccw(c1689.6,2699.88) 1689.6,2663.52 ; C14.2@1663.89,2674.17 ccw(c1689.6,2699.88) 1689.6,2663.52 ; C14.2@1663.89,2674.17 ccw(c1689.6,2699.88) 1689.6,2663.52 ; 1686.27,1368 cw(c1686.27,1331.64) R9.2@1711.98,1357.35 ; 1686.27,1368 ccw(c1686.27,1404.36) R9.2@1711.98,1378.65 ; 1686.27,1368 cw(c1686.27,1331.64) R9.2@1711.98,1357.35 ; 1686.27,1368 ccw(c1686.27,1404.36) R9.2@1711.98,1378.65 ; 1686.27,1368 cw(c1686.27,1331.64) R9.2@1711.98,1357.35 ; 1686.27,1368 ccw(c1686.27,1404.36) R9.2@1711.98,1378.65 ; 1686.27,1368 cw(c1686.27,1331.64) R9.2@1711.98,1357.35 ; 1686.27,1368 ccw(c1686.27,1404.36) R9.2@1711.98,1378.65 ; 1686.27,1368 cw(c1686.27,1331.64) R9.2@1711.98,1357.35 ; 1686.27,1368 ccw(c1686.27,1404.36) R9.2@1711.98,1378.65 ; R9.2@1711.98,1380.62 ccw(c1658.82,1433.77) 1734,1433.77 ; R9.2@1711.98,1380.62 ccw(c1658.82,1433.77) 1734,1433.77 ; R9.2@1711.98,1380.62 ccw(c1658.82,1433.77) 1734,1433.77 ; R9.2@1711.98,1380.62 ccw(c1658.82,1433.77) 1734,1433.77 ; R9.2@1711.98,1380.62 ccw(c1658.82,1433.77) 1734,1433.77 ; P10.1@1721.96,1730.96 cw(c1692.89,1701.89) 1734,1701.89 ; P10.1@1721.96,1730.96 cw(c1692.89,1701.89) 1734,1701.89 ; P10.1@1721.96,1730.96 cw(c1692.89,1701.89) 1734,1701.89 ; P10.1@1721.96,1730.96 cw(c1692.89,1701.89) 1734,1701.89 ; P10.1@1721.96,1730.96 cw(c1692.89,1701.89) 1734,1701.89 ; 1727.24,1407.04 ccw(c1744.34,1397.17) R9.2@1732.02,1381.74 ; 1727.24,1407.04 ccw(c1744.34,1397.17) R9.2@1732.02,1381.74 ; 1727.24,1407.04 ccw(c1744.34,1397.17) R9.2@1732.02,1381.74 ; 1727.24,1407.04 ccw(c1744.34,1397.17) R9.2@1732.02,1381.74 ; 1727.24,1407.04 ccw(c1744.34,1397.17) R9.2@1732.02,1381.74 ; 1727.24,1407.04 ccw(c1744.34,1397.17) R9.2@1732.02,1381.74 ; 1727.24,1407.04 ccw(c1744.34,1397.17) R9.2@1732.02,1381.74 ; 1727.24,1407.04 ccw(c1744.34,1397.17) R9.2@1732.02,1381.74 ; 1727.24,1407.04 ccw(c1744.34,1397.17) R9.2@1732.02,1381.74 ; 1727.24,1407.04 ccw(c1744.34,1397.17) R9.2@1732.02,1381.74 ; 1734,1701.89 cw(c1775.11,1701.89) P10.1@1746.04,1730.96 ; 1734,1701.89 cw(c1775.11,1701.89) P10.1@1746.04,1730.96 ; 1734,1701.89 cw(c1775.11,1701.89) P10.1@1746.04,1730.96 ; 1734,1701.89 cw(c1775.11,1701.89) P10.1@1746.04,1730.96 ; 1734,1701.89 cw(c1775.11,1701.89) P10.1@1746.04,1730.96 ; D2.1@1766.08,195.84 ccw(c1747.1,214.83) 1773.95,214.83 ; D2.1@1766.08,195.84 ccw(c1747.1,214.83) 1773.95,214.83 ; D2.1@1766.08,195.84 ccw(c1747.1,214.83) 1773.95,214.83 ; D2.1@1766.08,195.84 ccw(c1747.1,214.83) 1773.95,214.83 ; D2.1@1766.08,195.84 ccw(c1747.1,214.83) 1773.95,214.83 ; D2.1@1773.95,176.85 cw(c1773.95,150) 1792.93,168.99 ; D2.1@1773.95,176.85 cw(c1773.95,150) 1792.93,168.99 ; D2.1@1773.95,176.85 cw(c1773.95,150) 1792.93,168.99 ; D2.1@1773.95,176.85 cw(c1773.95,150) 1792.93,168.99 ; D2.1@1773.95,176.85 cw(c1773.95,150) 1792.93,168.99 ; 1773.95,214.83 ccw(c1800.8,214.83) D2.1@1781.81,195.84 ; 1773.95,214.83 ccw(c1800.8,214.83) D2.1@1781.81,195.84 ; 1773.95,214.83 ccw(c1800.8,214.83) D2.1@1781.81,195.84 ; 1773.95,214.83 ccw(c1800.8,214.83) D2.1@1781.81,195.84 ; 1773.95,214.83 ccw(c1800.8,214.83) D2.1@1781.81,195.84 ; 1776.27,2673.27 ccw(c1719.24,2730.31) U2.4@1799.9,2730.31 ; 1776.27,2673.27 ccw(c1719.24,2730.31) U2.4@1799.9,2730.31 ; 1776.27,2673.27 ccw(c1719.24,2730.31) U2.4@1799.9,2730.31 ; 1776.27,2673.27 ccw(c1719.24,2730.31) U2.4@1799.9,2730.31 ; 1776.27,2673.27 ccw(c1719.24,2730.31) U2.4@1799.9,2730.31 ; D2.1@1785.07,187.98 ccw(c1811.92,187.98) 1792.93,168.99 ; D2.1@1785.07,187.98 ccw(c1811.92,187.98) 1792.93,168.99 ; D2.1@1785.07,187.98 ccw(c1811.92,187.98) 1792.93,168.99 ; D2.1@1785.07,187.98 ccw(c1811.92,187.98) 1792.93,168.99 ; D2.1@1785.07,187.98 ccw(c1811.92,187.98) 1792.93,168.99 ; 1787.32,2684.32 cw(c1828.74,2642.9) U2.4@1828.74,2701.48 ; 1787.32,2684.32 cw(c1828.74,2642.9) U2.4@1828.74,2701.48 ; 1787.32,2684.32 cw(c1828.74,2642.9) U2.4@1828.74,2701.48 ; 1787.32,2684.32 cw(c1828.74,2642.9) U2.4@1828.74,2701.48 ; 1787.32,2684.32 cw(c1828.74,2642.9) U2.4@1828.74,2701.48 ; 1788,2685 cw(c1827.79,2645.22) U2.4@1828.42,2701.48 ; 1788,2685 ccw(c1756.24,2716.76) U2.4@1800.39,2725.02 ; 1788,2685 cw(c1827.79,2645.22) U2.4@1828.42,2701.48 ; 1788,2685 ccw(c1756.24,2716.76) U2.4@1800.39,2725.02 ; 1788,2685 cw(c1827.79,2645.22) U2.4@1828.42,2701.48 ; 1788,2685 ccw(c1756.24,2716.76) U2.4@1800.39,2725.02 ; 1788,2685 cw(c1827.79,2645.22) U2.4@1828.42,2701.48 ; 1788,2685 ccw(c1756.24,2716.76) U2.4@1800.39,2725.02 ; 1788,2685 cw(c1827.79,2645.22) U2.4@1828.42,2701.48 ; 1788,2685 ccw(c1756.24,2716.76) U2.4@1800.39,2725.02 ; U2.4@1808.35,2794.01 ccw(c1763.87,2838.49) 1826.77,2838.49 ; U2.4@1808.35,2794.01 ccw(c1763.87,2838.49) 1826.77,2838.49 ; U2.4@1808.35,2794.01 ccw(c1763.87,2838.49) 1826.77,2838.49 ; U2.4@1808.35,2794.01 ccw(c1763.87,2838.49) 1826.77,2838.49 ; U2.4@1808.35,2794.01 ccw(c1763.87,2838.49) 1826.77,2838.49 ; D1.1@1816.12,2987.38 cw(c1790.42,2961.68) 1826.77,2961.68 ; D1.1@1816.12,2987.38 cw(c1790.42,2961.68) 1826.77,2961.68 ; D1.1@1816.12,2987.38 cw(c1790.42,2961.68) 1826.77,2961.68 ; D1.1@1816.12,2987.38 cw(c1790.42,2961.68) 1826.77,2961.68 ; D1.1@1816.12,2987.38 cw(c1790.42,2961.68) 1826.77,2961.68 ; 1826.77,2848 ccw(c1903.11,2848) U2.4@1849.13,2794.01 ; 1826.77,2848 ccw(c1903.11,2848) U2.4@1849.13,2794.01 ; 1826.77,2848 ccw(c1903.11,2848) U2.4@1849.13,2794.01 ; 1826.77,2848 ccw(c1903.11,2848) U2.4@1849.13,2794.01 ; 1826.77,2848 ccw(c1903.11,2848) U2.4@1849.13,2794.01 ; 1826.77,2961.68 cw(c1863.13,2961.68) D1.1@1837.42,2987.38 ; 1826.77,2961.68 cw(c1863.13,2961.68) D1.1@1837.42,2987.38 ; 1826.77,2961.68 cw(c1863.13,2961.68) D1.1@1837.42,2987.38 ; 1826.77,2961.68 cw(c1863.13,2961.68) D1.1@1837.42,2987.38 ; 1826.77,2961.68 cw(c1863.13,2961.68) D1.1@1837.42,2987.38 ; U2.4@1828.74,2701.48 cw(c1828.74,2571.63) 1920.56,2663.44 ; U2.4@1828.74,2701.48 cw(c1828.74,2571.63) 1920.56,2663.44 ; U2.4@1828.74,2701.48 cw(c1828.74,2571.63) 1920.56,2663.44 ; U2.4@1828.74,2701.48 cw(c1828.74,2571.63) 1920.56,2663.44 ; U2.4@1828.74,2726.48 cw(c1828.74,2656.98) 1877.88,2706.12 ; U2.4@1828.74,2726.48 cw(c1828.74,2656.98) 1877.88,2706.12 ; U2.4@1828.74,2726.48 cw(c1828.74,2656.98) 1877.88,2706.12 ; U2.4@1828.74,2726.48 cw(c1828.74,2656.98) 1877.88,2706.12 ; 2033.68,2095.63 cw(c2033.68,2059.27) C2.2@2059.38,2084.98 ; 2033.68,2095.63 ccw(c2033.68,2131.99) C2.2@2059.38,2106.28 ; 2033.68,2095.63 cw(c2033.68,2059.27) C2.2@2059.38,2084.98 ; 2033.68,2095.63 ccw(c2033.68,2131.99) C2.2@2059.38,2106.28 ; 2033.68,2095.63 cw(c2033.68,2059.27) C2.2@2059.38,2084.98 ; 2033.68,2095.63 ccw(c2033.68,2131.99) C2.2@2059.38,2106.28 ; 2033.68,2095.63 cw(c2033.68,2059.27) C2.2@2059.38,2084.98 ; 2033.68,2095.63 ccw(c2033.68,2131.99) C2.2@2059.38,2106.28 ; 2033.68,2095.63 cw(c2033.68,2059.27) C2.2@2059.38,2084.98 ; 2033.68,2095.63 ccw(c2033.68,2131.99) C2.2@2059.38,2106.28 ; D3.1@2100.73,180.11 cw(c2081.74,161.13) 2108.59,161.13 ; D3.1@2100.73,180.11 cw(c2081.74,161.13) 2108.59,161.13 ; D3.1@2100.73,180.11 cw(c2081.74,161.13) 2108.59,161.13 ; D3.1@2100.73,180.11 cw(c2081.74,161.13) 2108.59,161.13 ; D3.1@2100.73,180.11 cw(c2081.74,161.13) 2108.59,161.13 ; 2108.59,161.13 cw(c2135.44,161.13) D3.1@2116.45,180.11 ; 2108.59,161.13 cw(c2135.44,161.13) D3.1@2116.45,180.11 ; 2108.59,161.13 cw(c2135.44,161.13) D3.1@2116.45,180.11 ; 2108.59,161.13 cw(c2135.44,161.13) D3.1@2116.45,180.11 ; 2108.59,161.13 cw(c2135.44,161.13) D3.1@2116.45,180.11 ; C3.2@2458.98,2099.62 ccw(c2433.27,2125.32) 2469.63,2125.32 ; C3.2@2458.98,2099.62 ccw(c2433.27,2125.32) 2469.63,2125.32 ; C3.2@2458.98,2099.62 ccw(c2433.27,2125.32) 2469.63,2125.32 ; C3.2@2458.98,2099.62 ccw(c2433.27,2125.32) 2469.63,2125.32 ; C3.2@2458.98,2099.62 ccw(c2433.27,2125.32) 2469.63,2125.32 ; 2469.63,2125.32 ccw(c2505.99,2125.32) C3.2@2480.28,2099.62 ; 2469.63,2125.32 ccw(c2505.99,2125.32) C3.2@2480.28,2099.62 ; 2469.63,2125.32 ccw(c2505.99,2125.32) C3.2@2480.28,2099.62 ; 2469.63,2125.32 ccw(c2505.99,2125.32) C3.2@2480.28,2099.62 ; 2469.63,2125.32 ccw(c2505.99,2125.32) C3.2@2480.28,2099.62 ; 2904.91,138.21 cw(c2940.7,102.42) P7.3@2940.7,153.04 ; 2904.91,138.21 ccw(c2869.12,174) P7.3@2919.74,174 ; 2904.91,138.21 cw(c2940.7,102.42) P7.3@2940.7,153.04 ; 2904.91,138.21 ccw(c2869.12,174) P7.3@2919.74,174 ; 2904.91,138.21 cw(c2940.7,102.42) P7.3@2940.7,153.04 ; 2904.91,138.21 ccw(c2869.12,174) P7.3@2919.74,174 ; 2904.91,138.21 cw(c2940.7,102.42) P7.3@2940.7,153.04 ; 2904.91,138.21 ccw(c2869.12,174) P7.3@2919.74,174 ; 2904.91,138.21 cw(c2940.7,102.42) P7.3@2940.7,153.04 ; 2904.91,138.21 ccw(c2869.12,174) P7.3@2919.74,174
  Bottom Layer w10: v2(627.47,1968.47) 720.47,1968.47 759,2007 759,2148 819,2208 v2(1037,2208) ; v2(2440.94,2755.91) 2440.94,2519.68 2519.68,2440.94 2766.73,2440.94 2806.1,2401.57 U3.4@2806.1,2324.8 ; v2@636.31,1959.63 cw(c657.65,1938.29) 657.65,1968.47 ; v2@636.31,1959.63 cw(c657.65,1938.29) 657.65,1968.47 ; v2@636.31,1959.63 cw(c657.65,1938.29) 657.65,1968.47 ; v2@636.31,1959.63 cw(c657.65,1938.29) 657.65,1968.47 ; v2@636.31,1959.63 cw(c657.65,1938.29) 657.65,1968.47 ; v2@636.31,1977.31 ccw(c657.65,1998.65) 657.65,1968.47 ; v2@636.31,1977.31 ccw(c657.65,1998.65) 657.65,1968.47 ; v2@636.31,1977.31 ccw(c657.65,1998.65) 657.65,1968.47 ; v2@636.31,1977.31 ccw(c657.65,1998.65) 657.65,1968.47 ; v2@636.31,1977.31 ccw(c657.65,1998.65) 657.65,1968.47 ; 1006.82,2208 cw(c1006.82,2177.82) v2@1028.16,2199.16 ; 1006.82,2208 ccw(c1006.82,2238.18) v2@1028.16,2216.84 ; 1006.82,2208 cw(c1006.82,2177.82) v2@1028.16,2199.16 ; 1006.82,2208 ccw(c1006.82,2238.18) v2@1028.16,2216.84 ; 1006.82,2208 cw(c1006.82,2177.82) v2@1028.16,2199.16 ; 1006.82,2208 ccw(c1006.82,2238.18) v2@1028.16,2216.84 ; 1006.82,2208 cw(c1006.82,2177.82) v2@1028.16,2199.16 ; 1006.82,2208 ccw(c1006.82,2238.18) v2@1028.16,2216.84 ; 1006.82,2208 cw(c1006.82,2177.82) v2@1028.16,2199.16 ; 1006.82,2208 ccw(c1006.82,2238.18) v2@1028.16,2216.84
  Bottom Layer w25: P9.2@1338,2376 1588,2126 1588,1889 P10.1@1734,1743 1821,1656 v2(1997,1656) ; P9.2@1338,2358.97 cw(c1338,2317.86) 1367.07,2346.93 ; P9.2@1338,2358.97 cw(c1338,2317.86) 1367.07,2346.93 ; P9.2@1338,2358.97 cw(c1338,2317.86) 1367.07,2346.93 ; P9.2@1338,2358.97 cw(c1338,2317.86) 1367.07,2346.93 ; P9.2@1338,2358.97 cw(c1338,2317.86) 1367.07,2346.93 ; P9.2@1355.03,2376 ccw(c1396.14,2376) 1367.07,2346.93 ; P9.2@1355.03,2376 ccw(c1396.14,2376) 1367.07,2346.93 ; P9.2@1355.03,2376 ccw(c1396.14,2376) 1367.07,2346.93 ; P9.2@1355.03,2376 ccw(c1396.14,2376) 1367.07,2346.93 ; P9.2@1355.03,2376 ccw(c1396.14,2376) 1367.07,2346.93 ; P10.1@1704.93,1772.07 cw(c1675.86,1743) P10.1@1716.97,1743 ; P10.1@1704.93,1772.07 ccw(c1734,1801.14) P10.1@1734,1760.03 ; P10.1@1704.93,1772.07 cw(c1675.86,1743) P10.1@1716.97,1743 ; P10.1@1704.93,1772.07 ccw(c1734,1801.14) P10.1@1734,1760.03 ; P10.1@1704.93,1772.07 cw(c1675.86,1743) P10.1@1716.97,1743 ; P10.1@1704.93,1772.07 ccw(c1734,1801.14) P10.1@1734,1760.03 ; P10.1@1704.93,1772.07 cw(c1675.86,1743) P10.1@1716.97,1743 ; P10.1@1704.93,1772.07 ccw(c1734,1801.14) P10.1@1734,1760.03 ; P10.1@1704.93,1772.07 cw(c1675.86,1743) P10.1@1716.97,1743 ; P10.1@1704.93,1772.07 ccw(c1734,1801.14) P10.1@1734,1760.03 ; P10.1@1734,1725.97 cw(c1734,1684.86) P10.1@1763.07,1713.93 ; P10.1@1734,1725.97 cw(c1734,1684.86) P10.1@1763.07,1713.93 ; P10.1@1734,1725.97 cw(c1734,1684.86) P10.1@1763.07,1713.93 ; P10.1@1734,1725.97 cw(c1734,1684.86) P10.1@1763.07,1713.93 ; P10.1@1734,1725.97 cw(c1734,1684.86) P10.1@1763.07,1713.93 ; P10.1@1751.03,1743 ccw(c1792.14,1743) P10.1@1763.07,1713.93 ; P10.1@1751.03,1743 ccw(c1792.14,1743) P10.1@1763.07,1713.93 ; P10.1@1751.03,1743 ccw(c1792.14,1743) P10.1@1763.07,1713.93 ; P10.1@1751.03,1743 ccw(c1792.14,1743) P10.1@1763.07,1713.93 ; P10.1@1751.03,1743 ccw(c1792.14,1743) P10.1@1763.07,1713.93